# Altium PCB MainBoard.PcbDoc
Units mm, origin at the board's own origin, x right, y up, seen from the top; angles counter-clockwise.
Board outline 91.69 x 65.91 mm, 2 copper layers (Top Layer, Bottom Layer); 102 components, 75 nets, 350 pads, 131 vias.
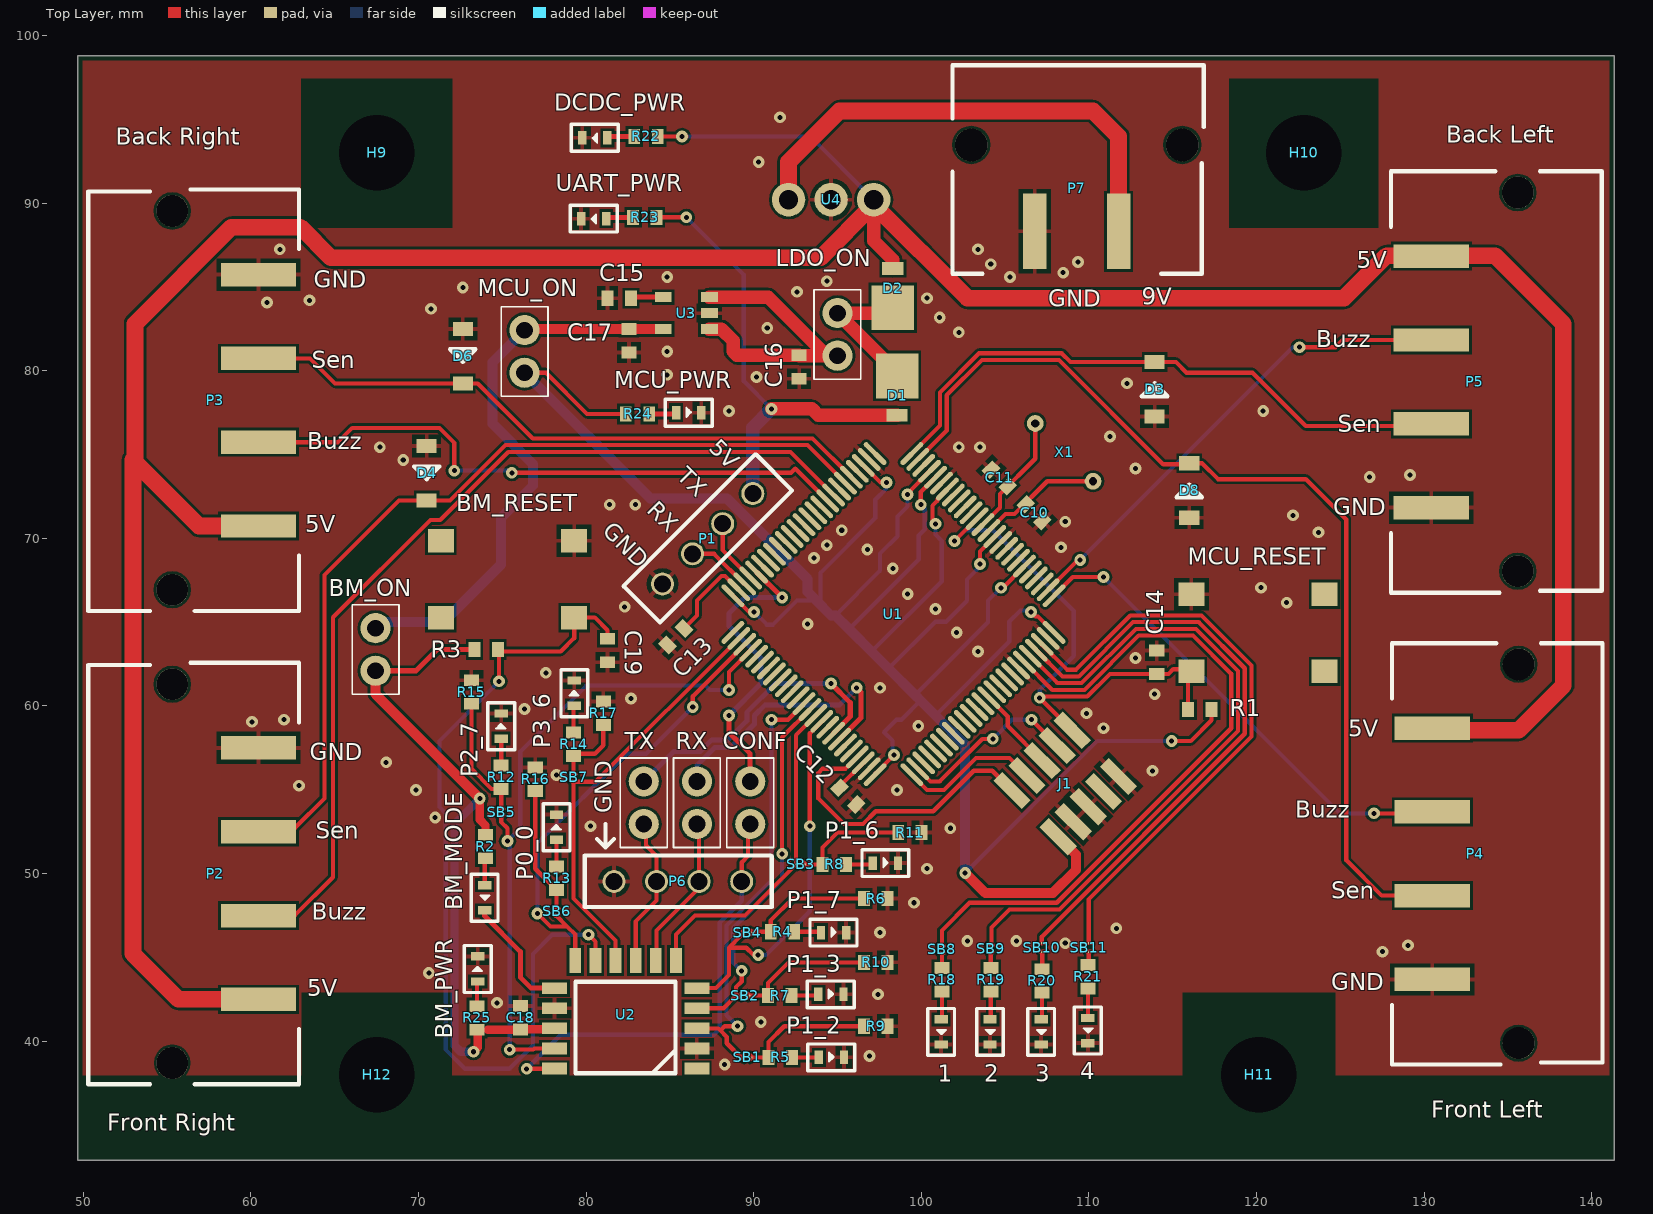
[diagram p0: Top Layer view]
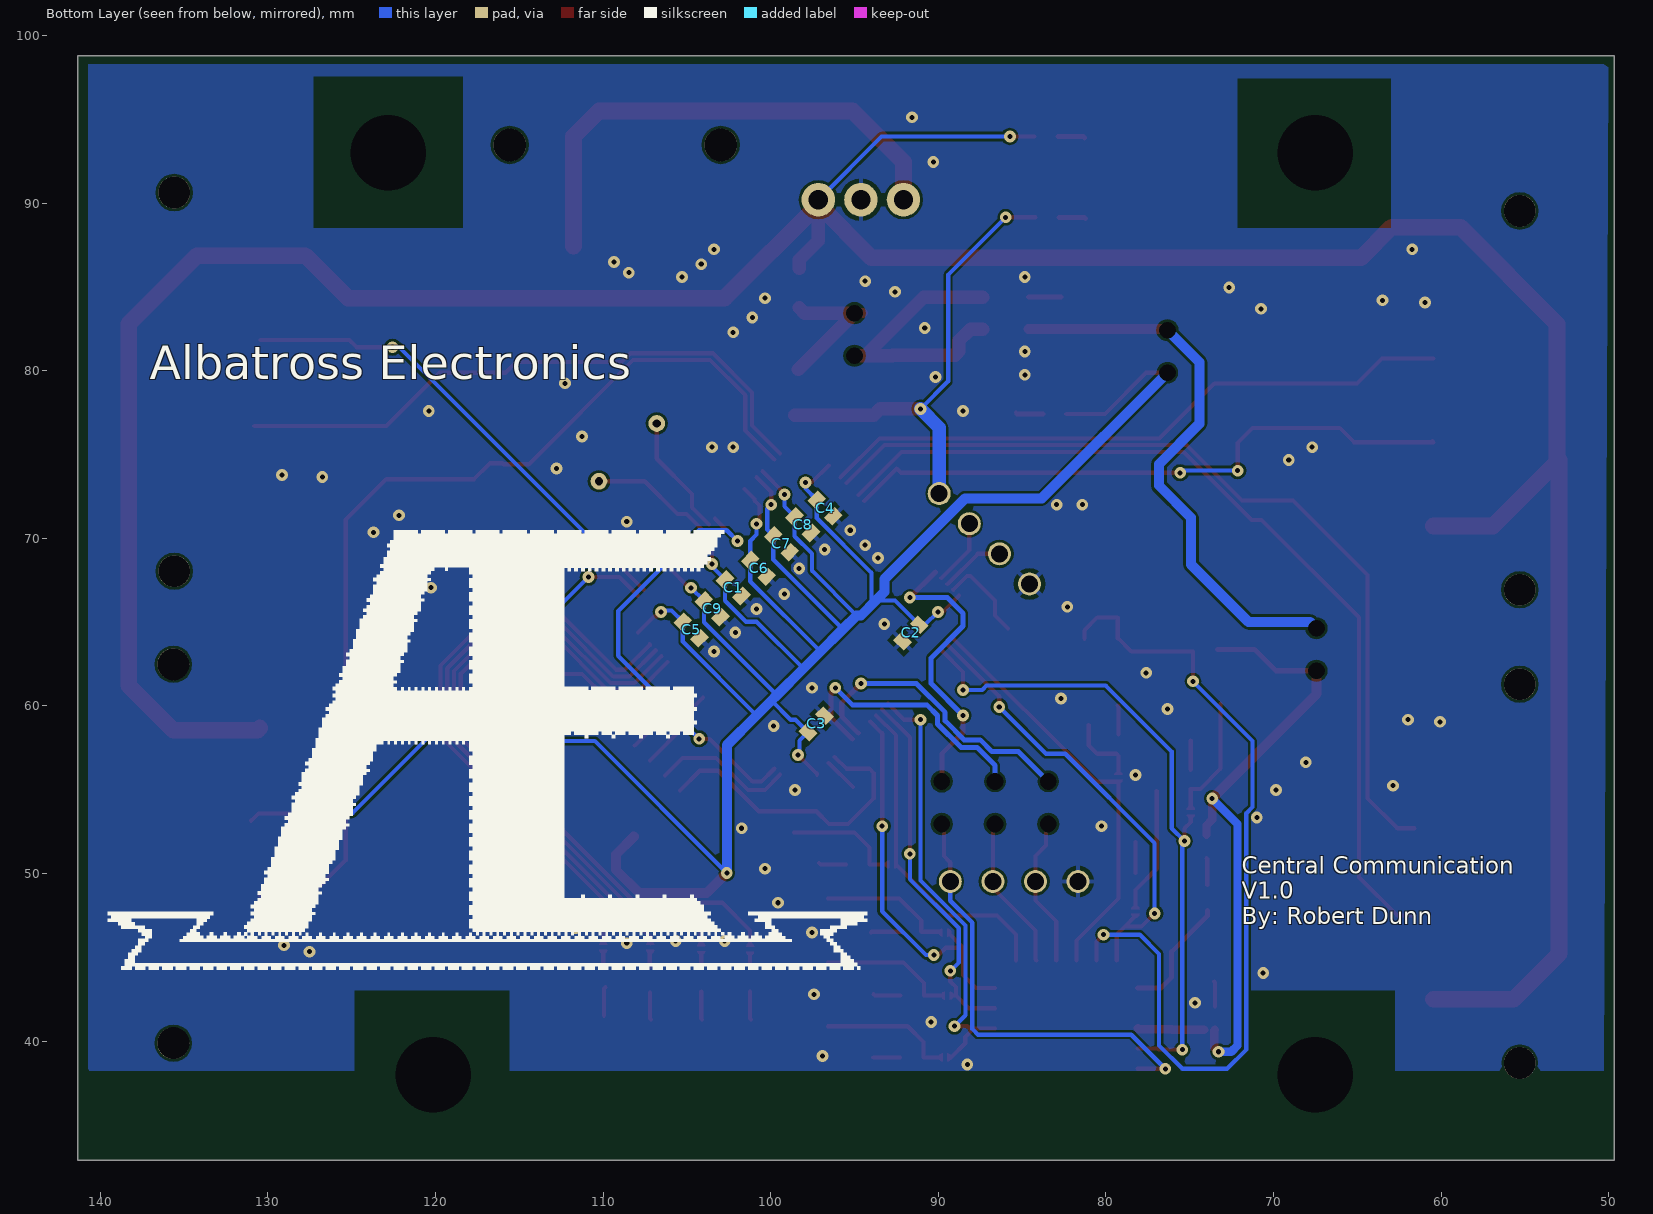
[diagram p1: Bottom Layer view, seen from below]
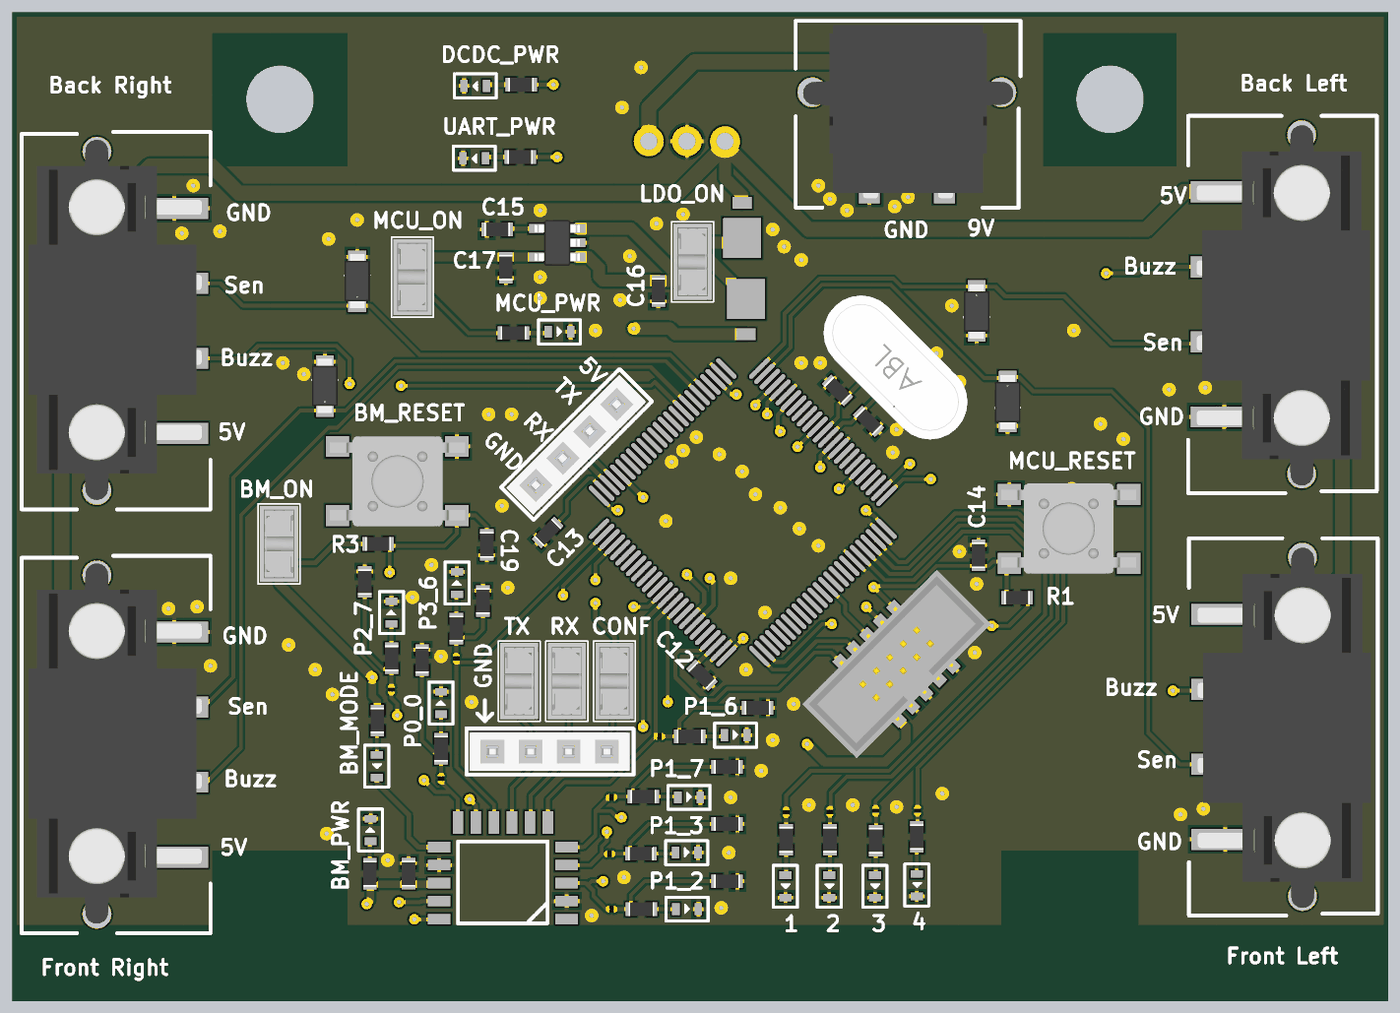
[diagram p2: 3D render of the assembled board from above, using the file's embedded part models]
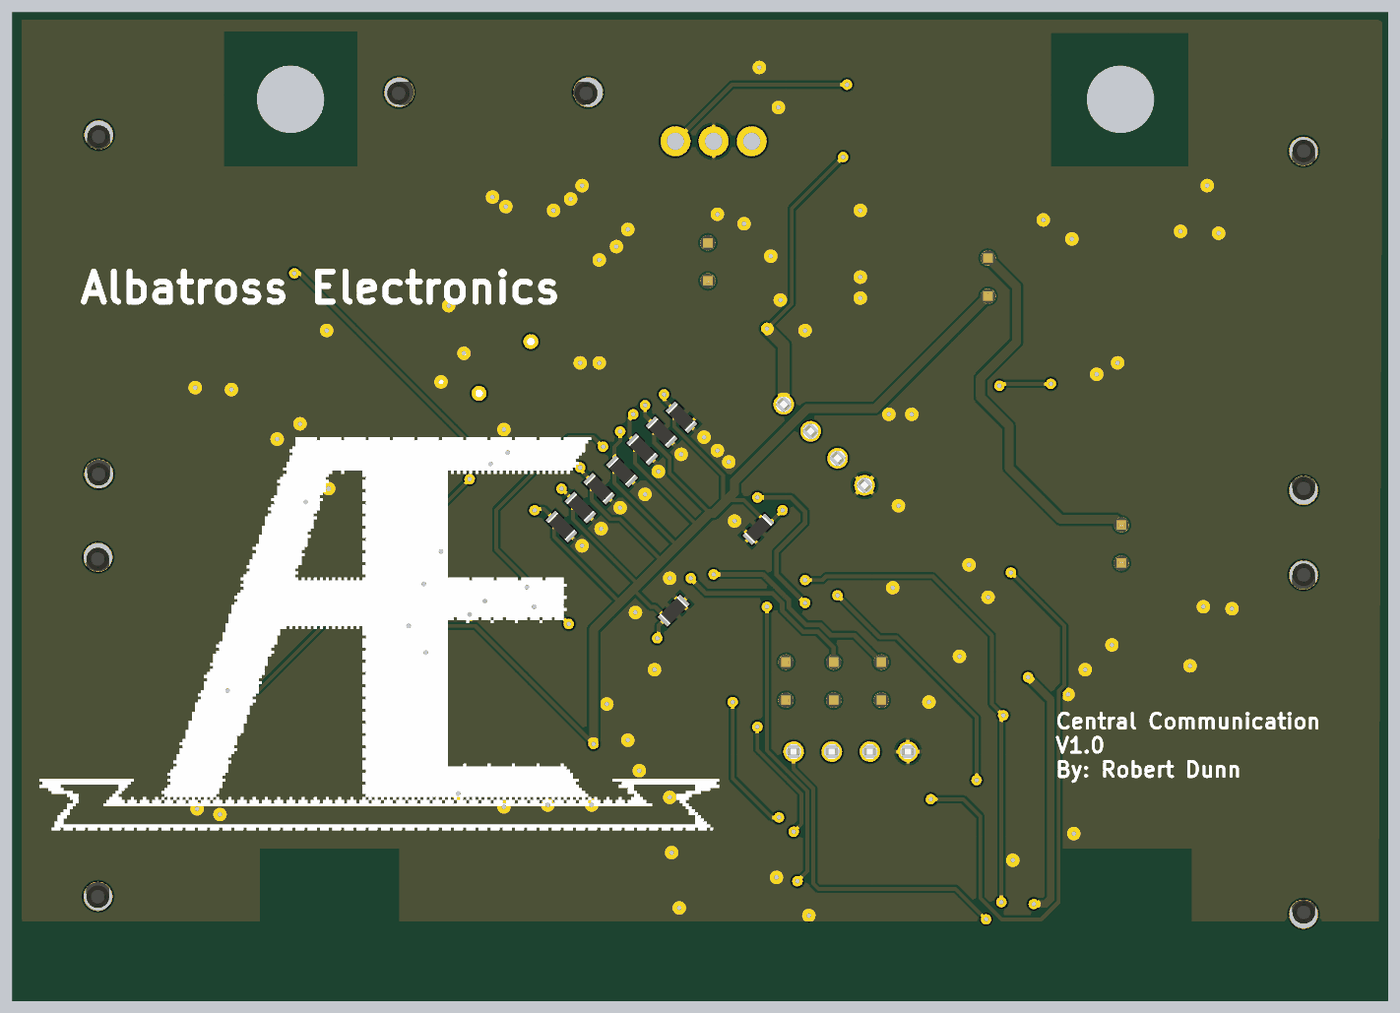
[diagram p3: 3D render of the assembled board from below, using the file's embedded part models]

## Layer stack, top to bottom
Top Solder: solder mask 0.0102, Solder Resist, Dk 3.5
Top Layer: signal copper 0.0356
Dielectric 1: dielectric 0.32, FR-4, Dk 4.8
Bottom Layer: signal copper 0.0356
Bottom Solder: solder mask 0.0102, Solder Resist, Dk 3.5

## Board outline
49.657,32.893 141.351,32.893 141.351,98.806 49.657,98.806

## Design rules (kind name [scope] priority, off if disabled: settings)
BoardOutlineClearance [All] p1: gap=0.3 ignorepadtopadclearanceinfootprint=FALSE
Clearance [All] p1: gap=0.152 ignorepadtopadclearanceinfootprint=FALSE except(0: Arc-Hole Track-Hole SMDPad-Hole THPad-Hole Via-Hole Fill-Hole Poly-Hole Region-Hole Text-Hole)
ComponentClearance [All] p1: gap=0.1 collisioncheckmode=3 verticalgap=0.254 showdistances=FALSE
FabricationTestPointUsage TestPointUsage [All] p1: valid=0 allowmultiple=FALSE
FabricationTestpoint Testpoint [All] p1: side=3 testpointundercomponent=TRUE minsize=1.016 maxsize=2.54 preferedsize=1.524 minholesize=0 maxholesize=1.016 preferedholesize=0.813 testpointgrid=0.025 allowsidetop=TRUE allowsidebottom=TRUE usegrid=TRUE gridtolerance=0
HoleSize [All] p1: absolutevalues=TRUE maxlimit=6.3 minlimit=0.3 maxpercent=80.000 minpercent=20.000
HoleToHoleClearance [All] p1: gap=0.45 allowstackedmicrovias=TRUE
MinimumAnnularRing [All] p1: minimumring=0.15
MinimumSolderMaskSliver [All] p1: minsoldermaskwidth=0.075
PlaneClearance [All] p1: clearance=0.5
PlaneConnect [All] p1: planeconnectstyle=Direct reliefexpansion=0.508 reliefentries=4 reliefconductorwidth=0.254 reliefairgap=0.254
PolygonConnect "GND Via" [isVia AND InNet('GND')] p1: connectstyle=Direct reliefconductorwidth=0.254 reliefentries=4 polygonreliefangle="90 Angle" airgapwidth=0.254 // GND Via Connection
PolygonConnect [All] p2: connectstyle=Relief reliefconductorwidth=0.254 reliefentries=4 polygonreliefangle="90 Angle" airgapwidth=0.25
RoutingVias [All] p1: holewidth=0.3 width=0.6 viastyle="Through Hole" minholewidth=0.3 minwidth=0.6 maxholewidth=6.3 maxwidth=6.6
SilkToSilkClearance [All] p1: silktosilkclearance=0.15
SilkToSolderMaskClearance SilkscreenOverComponentPads [IsPad] p1: minsilkscreentomaskgap=0.25 clearancetoexposedcopper=TRUE
SolderMaskExpansion [All] p1: expansion=0.1
Width [All] p1: maxlimit=2 minlimit=0.152 preferedwidth=0.25 minimp=50.000000 maximp=50.000000 favimp=50.000000
20 further rules are at their usual default settings.

## Components (designator, comment, footprint, x,y, rotation, side; value= is the part's Value field where it differs from the comment)
1 "LED" SMD_0603_LED 101.224,40.553 r270 top
2 "LED" SMD_0603_LED 104.145,40.553 r270 top
3 "LED" SMD_0603_LED 107.193,40.553 r270 top
4 "LED" SMD_0603_LED 109.982,40.64 r270 top
BM_MODE "LED" SMD_0603_LED 73.994,48.564 r270 top
BM_ON "2.54Jump" Jumper 67.437,62.103 r0 top
BM_PWR "LED" SMD_0603_LED 73.486,44.308 r90 top
BM_RESET "Tactile Switch" "C&K 4 pin Tactile Switch" 75.311,67.564 r0 top
C1 "SCH_GENERIC_CAPACITOR_0603" PCB_GENERIC_SMD_0603 102.235,67.056 r45 bottom
C2 "SCH_GENERIC_CAPACITOR_0603" PCB_GENERIC_SMD_0603 91.635,64.355 r135 bottom
C3 "SCH_GENERIC_CAPACITOR_0603" PCB_GENERIC_SMD_0603 97.282,58.928 r315 bottom
C4 "SCH_GENERIC_CAPACITOR_0603" PCB_GENERIC_SMD_0603 96.754,71.809 r45 bottom
C5 "SCH_GENERIC_CAPACITOR_0603" PCB_GENERIC_SMD_0603 104.746,64.535 r45 bottom
C6 "SCH_GENERIC_CAPACITOR_0603" PCB_GENERIC_SMD_0603 100.724,68.212 r45 bottom
C7 "SCH_GENERIC_CAPACITOR_0603" PCB_GENERIC_SMD_0603 99.353,69.673 r45 bottom
C8 "SCH_GENERIC_CAPACITOR_0603" PCB_GENERIC_SMD_0603 98.083,70.816 r45 bottom
C9 "SCH_GENERIC_CAPACITOR_0603" PCB_GENERIC_SMD_0603 103.489,65.792 r45 bottom
C10 "SCH_GENERIC_CAPACITOR_0603" PCB_GENERIC_SMD_0603 106.722,71.539 r135 top
C11 "SCH_GENERIC_CAPACITOR_0603" PCB_GENERIC_SMD_0603 104.656,73.605 r315 top
C12 "SCH_GENERIC_CAPACITOR_0603" PCB_GENERIC_SMD_0603 95.618,54.623 r135 top
C13 "SCH_GENERIC_CAPACITOR_0603" PCB_GENERIC_SMD_0603 85.344,64.135 r45 top
C14 "SCH_GENERIC_CAPACITOR_0603" PCB_GENERIC_SMD_0603 114.046,62.611 r90 top
C15 "SCH_GENERIC_CAPACITOR_0603" PCB_GENERIC_SMD_0603 81.977,84.328 r0 top
C16 "SCH_GENERIC_CAPACITOR_0603" PCB_GENERIC_SMD_0603 92.71,80.229 r270 top
C17 "SCH_GENERIC_CAPACITOR_0603" PCB_GENERIC_SMD_0603 82.55,81.788 r90 top
C18 "SCH_GENERIC_CAPACITOR_0603" PCB_GENERIC_SMD_0603 76.073,41.402 r270 top
C19 "C060-0001U-00" PCB_GENERIC_SMD_0603 81.28,63.311 r90 top value=1uF
CONF "2.54Jump" Jumper 89.789,55.499 r180 top
D1 "ONSEMI_MBRM110LT1G" "ON Semi Schottky Diode - MBRM110LT1G" 98.552,78.994 r270 top
D2 "ONSEMI_MBRM110LT1G" "ON Semi Schottky Diode - MBRM110LT1G" 98.298,84.455 r90 top
D3 "Zener3V3" Zener3V3 113.919,80.518 r180 top
D4 "Zener3V3" Zener3V3 70.485,72.263 r0 top
D6 "Zener3V3" Zener3V3 72.644,79.248 r0 top
D8 "Zener3V3" Zener3V3 115.983,74.486 r180 top
DCDC_PWR "LED" SMD_0603_LED 80.518,93.853 r180 top
H9 "M4_Hole" M4_Hole#1 52.197,79.121 r0 top
H10 "M4_Hole" M4_Hole#2 105.283,78.613 r0 top
H11 "M4_Hole" M4_Hole#3 102.616,25.019 r0 top
H12 "M4_Hole" M4_Hole#4 49.784,25.019 r0 top
J1 "JTDI Header" CONN-50mil-10POS-SMD 108.585,55.372 r135 top
LDO_ON "2.54Jump" Jumper 94.996,83.439 r180 top
MCU_ON "2.54Jump" Jumper 76.327,82.423 r180 top
MCU_PWR "LED" SMD_0603_LED 86.114,77.549 r0 top
MCU_RESET "Tactile Switch" "C&K 4 pin Tactile Switch" 120.083,64.368 r180 top
P0_0 "LED" SMD_0603_LED 78.185,52.767 r90 top
P1 "4-Pin Vertical Header" "4-Pin Vertical Header" 87.249,69.977 r135 top
P1_2 "LED" SMD_0603_LED 94.63,39.083 r0 top
P1_3 "LED" SMD_0603_LED 94.6,42.846 r0 top
P1_6 "LED" SMD_0603_LED 97.855,50.673 r0 top
P1_7 "LED" SMD_0603_LED 94.757,46.529 r0 top
P2 "4 Screw Term" "4 Pin Screw Terminal" 60.452,57.498 r270 top
P2_7 "LED" SMD_0603_LED 74.883,58.799 r90 top
P3 "4 Screw Term" "4 Pin Screw Terminal" 60.452,85.739 r270 top
P3_6 "LED" SMD_0603_LED 79.248,60.768 r90 top
P4 "4 Screw Term" "4 Pin Screw Terminal" 130.486,43.684 r90 top
P5 "4 Screw Term" "4 Pin Screw Terminal" 130.429,71.835 r90 top
P6 "4-Pin Vertical Header" "4-Pin Vertical Header" 85.471,49.53 r90 top
P7 "2 Screw Term" PCBComponent_1 111.77,88.322 r180 top
R1 "SCH_GENERIC_RESISTOR_0603" PCB_GENERIC_SMD_0603 116.616,59.782 r0 top
R2 "SCH_GENERIC_RESISTOR_0603" PCB_GENERIC_SMD_0603 73.994,51.612 r90 top
R3 "SCH_GENERIC_RESISTOR_0603" PCB_GENERIC_SMD_0603 74.041,63.373 r0 top
R4 "SCH_GENERIC_RESISTOR_0603" PCB_GENERIC_SMD_0603 91.709,46.529 r0 top
R5 "SCH_GENERIC_RESISTOR_0603" PCB_GENERIC_SMD_0603 91.582,39.036 r0 top
R6 "SCH_GENERIC_RESISTOR_0603" PCB_GENERIC_SMD_0603 97.282,48.514 r180 top
R7 "SCH_GENERIC_RESISTOR_0603" PCB_GENERIC_SMD_0603 91.552,42.719 r0 top
R8 "SCH_GENERIC_RESISTOR_0603" PCB_GENERIC_SMD_0603 94.807,50.546 r0 top
R9 "SCH_GENERIC_RESISTOR_0603" PCB_GENERIC_SMD_0603 97.282,40.894 r180 top
R10 "SCH_GENERIC_RESISTOR_0603" PCB_GENERIC_SMD_0603 97.282,44.704 r180 top
R11 "SCH_GENERIC_RESISTOR_0603" PCB_GENERIC_SMD_0603 99.314,52.451 r180 top
R12 "SCH_GENERIC_RESISTOR_0603" PCB_GENERIC_SMD_0603 74.93,55.751 r90 top
R13 "SCH_GENERIC_RESISTOR_0603" PCB_GENERIC_SMD_0603 78.232,49.719 r90 top
R14 "SCH_GENERIC_RESISTOR_0603" PCB_GENERIC_SMD_0603 79.248,57.72 r90 top
R15 "SCH_GENERIC_RESISTOR_0603" PCB_GENERIC_SMD_0603 73.152,60.833 r270 top
R16 "SCH_GENERIC_RESISTOR_0603" PCB_GENERIC_SMD_0603 76.962,55.626 r270 top
R17 "SCH_GENERIC_RESISTOR_0603" PCB_GENERIC_SMD_0603 81.026,59.563 r270 top
R18 "SCH_GENERIC_RESISTOR_0603" PCB_GENERIC_SMD_0603 101.224,43.663 r90 top
R19 "SCH_GENERIC_RESISTOR_0603" PCB_GENERIC_SMD_0603 104.145,43.663 r90 top
R20 "SCH_GENERIC_RESISTOR_0603" PCB_GENERIC_SMD_0603 107.193,43.601 r90 top
R21 "SCH_GENERIC_RESISTOR_0603" PCB_GENERIC_SMD_0603 109.94,43.84 r90 top
R22 "SCH_GENERIC_RESISTOR_0603" PCB_GENERIC_SMD_0603 83.566,93.98 r180 top
R23 "SCH_GENERIC_RESISTOR_0603" PCB_GENERIC_SMD_0603 83.501,89.154 r180 top
R24 "SCH_GENERIC_RESISTOR_0603" PCB_GENERIC_SMD_0603 83.066,77.422 r0 top
R25 "SCH_GENERIC_RESISTOR_0603" PCB_GENERIC_SMD_0603 73.486,41.387 r90 top
RX "2.54Jump" Jumper 86.614,55.499 r180 top
SB1 "N/O" SB_NO 89.656,39.036 r180 top
SB2 "N/O" SB_NO 89.52,42.719 r180 top
SB3 "N/O" SB_NO 92.837,50.546 r180 top
SB4 "N/O" SB_NO 89.662,46.482 r180 top
SB5 "N/O" SB_NO 74.93,53.721 r270 top
SB6 "N/O" SB_NO 78.232,47.793 r270 top
SB7 "N/O" SB_NO 79.248,55.794 r270 top
SB8 "N/O" SB_NO 101.224,45.428 r90 top
SB9 "N/O" SB_NO 104.14,45.466 r90 top
SB10 "N/O" SB_NO 107.188,45.538 r90 top
SB11 "N/O" SB_NO 109.982,45.538 r90 top
TX "2.54Jump" Jumper 83.439,55.499 r180 top
U1 "STM32F407VGT6" STM-LQFP100_N 98.337,65.482 r225 top
U2 "BM71BLES1FC2" BM71BLES1FC2 86.855,45.067 r180 top
U3 "3.3V LDO" SOT95P280X145-5N 85.979,83.439 r180 top
U4 "R78E-1.0 DC/DC" R78-1.0 94.615,92.456 r0 top
UART_PWR "LED" SMD_0603_LED 80.453,89.027 r180 top
X1 "XTAL" CRYSTAL_8MHZ 108.518,75.132 r135 top

## Footprints (in the part's own frame and the unit in brackets; to place one, negate y for a bottom-side part, rotate by r counter-clockwise, add the part's x,y. Pads: shape width x height; smd on the part's side, far side on the other; paste and mask are expansions set on the pad)
"4 Pin Screw Terminal" [mm]
  rect 1.4x4.5 smd: 1(0,0) 2(5,0) 3(10,0) 4(15,0)
  round 1.9 hole 1.9: ""(-3.8,-5.15) ""(18.8,-5.15)
  silkscreen extent -5.08,-10.16 20.07,2.41, body extent -4.57,-9.71 19.43,1.84, height 10.95
"4-Pin Vertical Header" [mil]
  round 54 hole 40: 1(0,150) 2(0,50) 3(0,-50) 4(0,-150)
  silkscreen extent -60,-220 61,219, body extent -50,-210 50,210, height 335
BM71BLES1FC2 [mm] "Bluetooth Module"
  rect 1.5x0.7 smd: 1(0.25,6.7) 2(0.25,5.5) 3(0.25,4.3) 4(0.25,3.1) 5(0.25,1.9) 12(8.75,1.9) 13(8.75,3.1) 14(8.75,4.3) 15(8.75,5.5) 16(8.75,6.7)
  rect 0.7x1.5 smd: 6(1.5,0.25) 7(2.7,0.25) 8(3.9,0.25) 9(5.1,0.25) 10(6.3,0.25) 11(7.5,0.25)
  silkscreen extent 1.52,1.52 7.49,6.99, body extent 0,7.49 9.02,11.56, height 2
"C&K 4 pin Tactile Switch" [mm] "4 Pin Tactile Switch, SMT"
  rect 1.55x1.4 smd mask+0.1: 1(-3.975,2.3)
  rect 1.55x1.4 smd: 2(3.975,2.3) 3(-3.975,-2.3) 4(3.975,-2.3)
  body extent -4.47,-3.02 4.53,2.98, height 5
CONN-50mil-10POS-SMD [mm] "50mil 10POS 2ROW SMT HEADER"
  rect 2.4x0.76 smd: 1(-1.95,2.54) 2(1.95,2.54) 3(-1.95,1.27) 4(1.95,1.27) 5(-1.95,0) 6(1.95,0) 7(-1.95,-1.27) 8(1.95,-1.27) 9(-1.95,-2.54) 10(1.95,-2.54)
  body extent -2.75,-6.33 2.75,6.32, height 5.57
CRYSTAL_8MHZ [mm] "631-1100-ND"
  round 1 hole 0.5: 1(-2.44,0) 2(2.44,0)
  body extent -5.75,-2.5 5.75,2.5, height 3.55
Jumper [mm]
  round 1.8 / inner round 0 / far side round 0 hole 1: 1(0,0) 2(0,2.54)
  silkscreen extent -1.4,-1.4 1.4,3.94, body extent -1.91,-1.27 1.27,3.94, height 11.35
M4_Hole#1 [mm]
  round 0 hole 4.5 unplated mask+2: 1(15.303,13.879)
M4_Hole#2 [mm]
  round 0 hole 4.5 unplated mask+2: 1(17.526,14.387)
M4_Hole#3 [mm]
  round 0 hole 4.5 unplated mask+2: 1(17.526,12.981)
M4_Hole#4 [mm]
  round 0 hole 4.5 unplated mask+2: 1(17.716,12.981)
"ON Semi Schottky Diode - MBRM110LT1G" [mm]
  rect 2.67x2.54 smd: 1(-0.7,0)
  rect 0.762x1.27 smd: 2(1.649,0)
  body extent -1.97,-1.65 0.95,1.65, height 1.02
PCB_GENERIC_SMD_0603 [mm]
  rect 0.7x0.9 smd: 1(-0.7,0) 2(0.7,0)
  body extent -0.85,-0.45 0.85,0.45, height 0.55
PCBComponent_1 [mm]
  rect 1.4x4.5 smd: 1(0,0) 2(5,0)
  round 1.95 hole 1.95 mask+0.102: 11(8.8,-5.15)
  round 1.95 hole 1.95: ""(-3.8,-5.15)
  silkscreen extent -5.08,-9.91 9.91,2.54, body extent -4.59,-9.63 9.41,1.92, height 10.95
R78-1.0 [mm]
  round 2 hole 1.15: 1(-2.54,-2.25) 2(0,-2.25) 3(2.54,-2.25)
  body extent -5.8,-4.25 5.8,4.25, height 10.4
SB_NO [mil] "Solder Bridge, Normally Open"
  round 5 smd paste-20 mask-1: 1(-8.5,0) 2(12.17,0)
  Top Layer region: -13,0 -12.28,3.64 -10.22,6.72 -7.14,8.78 -3.5,9.5 -3.5,9.5 -3.5,-9.5 -7.14,-8.78 -10.22,-6.72 -12.28,-3.64 -13,0
  Top Layer region: 17.5,0 16.78,-3.64 14.72,-6.72 11.64,-8.78 8,-9.5 8,-9.5 8,9.5 11.64,8.78 14.72,6.72 16.78,3.64 17.5,0
SMD_0603_LED [mm]
  rect 0.5x0.8 smd: 1(-0.747,-0.047) 2(0.753,-0.047)
  silkscreen extent -1.4,-0.85 1.4,0.75, body extent -0.75,-0.55 0.75,0.45, height 0.45
SOT95P280X145-5N [mm] "SOT23, 5-Leads, Body 2.90x2.80mm, Pitch 0.95mm, IPC Medium Density"
  rect 1x0.6 smd: 1(-1.375,0.95) 2(-1.375,0) 3(-1.375,-0.95) 4(1.375,-0.95) 5(1.375,0.95)
  body extent -1.5,-1.53 1.5,1.53, height 1.45
STM-LQFP100_N [mm] "Thin QFP, 100-Leads, Body 14x14mm, Pitch 0.5mm, IPC Medium Density"
  oval 1.8x0.3 smd: 1(-7.55,6) 2(-7.55,5.5) 3(-7.55,5) 4(-7.55,4.5) 5(-7.55,4) 6(-7.55,3.5) 7(-7.55,3) 8(-7.55,2.5) 9(-7.55,2) 10(-7.55,1.5) 11(-7.55,1) 12(-7.55,0.5) 13(-7.55,0) 14(-7.55,-0.5) 15(-7.55,-1) 16(-7.55,-1.5) 17(-7.55,-2) 18(-7.55,-2.5) 19(-7.55,-3) 20(-7.55,-3.5) 21(-7.55,-4) 22(-7.55,-4.5) 23(-7.55,-5) 24(-7.55,-5.5) 25(-7.55,-6) 51(7.55,-6) 52(7.55,-5.5) 53(7.55,-5) 54(7.55,-4.5) 55(7.55,-4) 56(7.55,-3.5) 57(7.55,-3) 58(7.55,-2.5) 59(7.55,-2) 60(7.55,-1.5) 61(7.55,-1) 62(7.55,-0.5) 63(7.55,0) 64(7.55,0.5) 65(7.55,1) 66(7.55,1.5) 67(7.55,2) 68(7.55,2.5) 69(7.55,3) 70(7.55,3.5) 71(7.55,4) 72(7.55,4.5) 73(7.55,5) 74(7.55,5.5) 75(7.55,6)
  oval 0.3x1.8 smd: 26(-6,-7.55) 27(-5.5,-7.55) 28(-5,-7.55) 29(-4.5,-7.55) 30(-4,-7.55) 31(-3.5,-7.55) 32(-3,-7.55) 33(-2.5,-7.55) 34(-2,-7.55) 35(-1.5,-7.55) 36(-1,-7.55) 37(-0.5,-7.55) 38(0,-7.55) 39(0.5,-7.55) 40(1,-7.55) 41(1.5,-7.55) 42(2,-7.55) 43(2.5,-7.55) 44(3,-7.55) 45(3.5,-7.55) 46(4,-7.55) 47(4.5,-7.55) 48(5,-7.55) 49(5.5,-7.55) 50(6,-7.55) 76(6,7.55) 77(5.5,7.55) 78(5,7.55) 79(4.5,7.55) 80(4,7.55) 81(3.5,7.55) 82(3,7.55) 83(2.5,7.55) 84(2,7.55) 85(1.5,7.55) 86(1,7.55) 87(0.5,7.55) 88(0,7.55) 89(-0.5,7.55) 90(-1,7.55) 91(-1.5,7.55) 92(-2,7.55) 93(-2.5,7.55) 94(-3,7.55) 95(-3.5,7.55) 96(-4,7.55) 97(-4.5,7.55) 98(-5,7.55) 99(-5.5,7.55) 100(-6,7.55)
  body extent -7,-7 7,7, height 1.6
Zener3V3 [mm]
  rect 1.2x0.85 smd: 1(0,0) 2(0,3.25)
  silkscreen extent -0.76,1.27 0.76,2.03, body extent -0.85,-0.15 0.85,3.45, height 0.84

## Part data
1 2 3 4 BM_MODE BM_PWR DCDC_PWR MCU_PWR P0_0 P1_2 P1_3 P1_6 P1_7 P2_7 P3_6 UART_PWR: library part SMD_0603_LED
BM_ON CONF LDO_ON MCU_ON RX TX: library part Jumper, "WM23943-ND"
BM_RESET MCU_RESET: library part "C&K Tactile Switch", Supplier Part Number 1=CKN9085CT-ND, Supplier 1=Digi-Key
C1 C2 C3 C4 C5 C6 C7 C8 C14: "Generic SMD capacitor 0603", Capacitance=0.1uF, Tolerance=*%
C9: "Generic SMD capacitor 0603", Capacitance=0.1uF
C10 C11: "Generic SMD capacitor 0603", Capacitance=30pF, Tolerance=*%
C12 C13: "Generic SMD capacitor 0603", Capacitance=2.2uF, Tolerance=*%
C15: "Generic SMD capacitor 0603", Capacitance=10nF, Tolerance=*%
C16: "Generic SMD capacitor 0603", Capacitance=1uF, Tolerance=*%
C17: "Generic SMD capacitor 0603", Capacitance=10uF
C18: "Generic SMD capacitor 0603", Capacitance=10uF, Tolerance=*%
C19: "CAP CER 0603 1uF 16V X5R 20%", Package=0603, Tolerance=20%, Voltage=16V
D1 D2: "DIODE SCHOTTKY 10V 1A", Supplier Part Number 1=MBRM110LT1GOSDKR-ND, Supplier 1=Digi-Key
D3 D4 D6 D8: library part DZ2W03300LCT-ND, "DZ2W03300LCT-ND"
J1: library part "conn_0.050\"_cortexM", "ARM Cortex-M 10pin connector,shrouded,SMT", Supplier Part Number 1=1175-1629-ND, Supplier 1=Digi-Key
P1 P6: Manufacturer=Sullins, Manufacturer No.=PPPC041LFBN-RC
P2 P3 P4 P5: library part 1297-1110-1-ND, "1297-1110-1-ND"
P7: Supplier Part Number=1297-1108-1-ND, Supplier=Digikey
R1 R6 R9 R10 R11 R15 R16 R17: "Generic SMD resistor 0603", Resistance=10K
R2 R4 R5 R7 R8 R12 R13 R14 R18 R19 R20 R21 R22 R23 R24 R25: "Generic SMD resistor 0603", Resistance=330R
R3: "Generic SMD resistor 0603", Resistance=4k7
SB1 SB2 SB3 SB4 SB5 SB6 SB7 SB8 SB9 SB10 SB11: library part SB_NO, "Solder Bridge, Normally Open"
U1: "ARM Cortex-M4 32-bit MCU+FPU, 210 DMIPS, 1024 kB Flash, 192 kB Internal RAM, 82 I/Os, 100-pin LQFP, -40 to 85 degC, Tray", I/Os (High Current)=82, Manufacturer=STMicroelectronics, Operating Frequency(F) (Processor speed) (MHz)=168, Supplier Part Number 1=497-11605-ND, Supply Voltage(Vcc) max (V)=3.6, Supply Voltage(Vcc) min (V)=1.8, ComponentLink1Description="Manufacturer URL", ComponentLink1URL=http://www.st.com/web/en/home.html, ComponentLink2Description=Datasheet, ComponentLink2URL=http://www.st.com/st-web-ui/static/active/en/resource/technical/document/datasheet/DM00037051.pdf, ComponentLink3Description="Package Specification", ComponentLink3URL=http://www.st.com/st-web-ui/static/active/en/resource/technical/document/data_brief/DM00071938.pdf, Core="ARM Cortex-M4", D/A Converter=2x12-bit, DatasheetVersion="Rev. 4", FLASH Size (Prog) (kB)=1024, Internal RAM Size (kB)=192, Mounting Technology="Surface Mount", PackageDescription="100-Pin Low Profile Quad Flat Package, 14 x 14 mm Body, 0.5 mm Pitch", PackageReference=LQFP100, PackageVersion="Rev. 1, 06/2013", Packing=Tray, PartNumber=STM32F407VGT6, Supplier 1=Digi-Key, Supplier 2=Farnell, Supplier 3=Newark, Supplier 4=Mouser, Supplier Part Number 2=2064368, Supplier Part Number 3=73T2333, Supplier Part Number 4=511-STM32F407VGT6
U2: library part "BM71 Bluetooth Module", "BM71 Bluetooth Module"
U3: library part 3V3LDO_TPS73633DBVR_SOT23-5, "Linear Voltage Regulator IC Positive Fixed 1 Output 3.3V 400mA SOT-23-5"
U4: library part R78E-1.0
X1: library part Crystal, Frequency=8MHz

## Via types
v1: diameter 0.7, hole 0.3, Top Layer to Bottom Layer, 131 vias

## Nets (pads, with @x,y where several pads share a name; then routed paths per layer and width w, separated by ;. In a path a pad name is that pad's centre, name@x,y a point inside that pad or via, vN(x,y) a via of type N, cw(c..) or ccw(c..) an arc to the next point about the centre after c; other vN are vias at no path point)
3V3: BM_ON.2 C17.2 MCU_ON.1 U3.5 | length 33.9
  Top Layer w0.6: MCU_ON.1 76.392,82.488 C17.2 ; C17.2 U3.5
  Bottom Layer w0.6: BM_ON.2 67.818,65.024 71.501,65.024 74.93,68.453 74.93,71.247 76.835,73.152 76.835,74.422 74.422,76.835 74.422,80.518 MCU_ON.1
3V3_BM: BM_ON.1 C18.2 R2.2 R3.1 R25.1 U2.14 | length 41.1
  Top Layer w0.3: BM_ON.1 69.85,62.103 71.12,63.373 R3.1
  Top Layer w0.5: v1(73.279,39.37) 73.533,39.624 73.533,40.64 R25.1 ; v1(73.66,54.483) 73.66,53.213 73.994,52.879 R2.2 ; 74.121,40.687 76.058,40.687 C18.2 78.04,40.702 U2.14
  Top Layer w0.6: BM_ON.1 67.437,60.706 v1(73.66,54.483)
  Bottom Layer w0.5: v1(73.279,39.37) 72.517,39.37 72.148,39.739 72.148,52.971 v1(73.66,54.483)
3V3_MCU: C1.2 C2.2 C3.2 C4.2 C5.2 C6.2 C7.2 C8.2 C9.2 J1.1 MCU_ON.2 R1.2 R24.1 U1.6 U1.11 U1.19 U1.21 U1.22 U1.28 U1.50 U1.75 U1.100 | length 169.6
  Top Layer w0.25: MCU_ON.2 77.597,79.883 80.058,77.422 R24.1 ; U1.50 89.721,65.613 v1(90.019,65.613) ; U1.28 97.554,73.336 v1(97.921,73.336) ; U1.75 97.241,55.952 v1(98.37,57.081) ; v1(99.178,72.617) 99.178,72.687 U1.22 ; v1@100.07,72.009 v1(99.966,72.009) 99.966,72.768 U1.21 ; v1(100.838,70.866) 100.667,71.037 100.667,71.952 100.965,72.25 100.965,72.353 U1.19 ; v1(103.505,68.47) 103.505,69.221 104.383,70.098 U1.11 ; v1@104.8,66.995 U1.6 ; v1(106.542,65.613) 106.812,65.343 106.961,65.343 U1.100 ; v1(114.935,57.912) 116.078,57.912 117.316,59.15 R1.2
  Top Layer w0.6: v1(102.616,50.038) 103.817,48.837 107.838,48.837 109.22,50.22 109.22,51.145 J1.1
  Bottom Layer w0.25: v1(90.019,65.613) 90.781,64.85 C2.2 92.584,66.294 93.726,66.294 93.98,66.294 93.98,67.945 97.249,71.214 C4.2 97.921,72.976 v1(97.921,73.336) ; 94.869,65.405 97.536,68.072 97.536,69.088 98.578,70.13 C8.2 99.178,71.911 v1(99.178,72.617) ; 95.694,64.579 99.848,68.733 C7.2 100.203,70.523 100.203,71.772 v1(99.966,72.009) ; 97.028,63.246 101.219,67.437 C6.2 101.219,69.85 100.838,70.231 v1(100.838,70.866) ; 98.044,62.23 100.838,65.024 101.473,65.024 102.73,66.281 C1.2 103.505,68.326 v1(103.505,68.47) ; v1(98.37,57.081) 98.28,57.171 98.28,57.93 C3.2 98.526,59.182 98.806,59.182 99.949,60.325 ; 99.632,60.642 103.984,64.995 C9.2 v1(104.746,67.049) ; 100.838,59.436 105.241,63.839 C5.2 105.914,65.702 106.452,65.702 v1(106.542,65.613) ; v1(102.616,50.038) 110.49,57.912 v1(114.935,57.912)
  Bottom Layer w0.6: MCU_ON.2 83.82,72.39 88.392,72.39 93.218,67.564 93.218,66.802 93.726,66.294 94.615,65.405 94.869,65.405 95.694,64.579 ; 95.758,64.516 97.028,63.246 98.044,62.23 99.632,60.642 99.949,60.325 100.838,59.436 102.616,57.658 v1(102.616,50.038)
5V: D1.1 D2.1 LDO_ON.1 | length 8.7
  Top Layer w0.6: LDO_ON.1@94.488,83.439 LDO_ON.1
  Top Layer w0.8: D2.1 97.982,83.439 LDO_ON.1 D1.1@98.36,80.075
5V_DCDC: D2.2 P2.4 P3.4 P4.4 P5.4 R22.1 U4.3 | length 200
  Top Layer w0.25: R22.1 v1@85.979,93.98
  Top Layer w0.8: U4.3 97.155,89.916 97.155,87.757 98.298,86.614 D2.2
  Top Layer w1: P2.4 55.673,42.498 52.959,45.212 52.959,74.676 53.086,74.549 ; P3.4 56.896,70.739 53.086,74.549 ; P4.4 130.623,58.547 135.636,58.547 138.303,61.214 138.303,82.804 134.239,86.868 127.762,86.868 125.222,84.328 102.743,84.328 97.155,89.916 93.98,86.741 64.77,86.741 62.945,88.566 58.848,88.566 53.086,82.804 53.086,74.549
  Bottom Layer w0.25: v1(85.725,93.98) 93.381,93.98 U4.3
5V_UART: D1.2 P1.4 R23.1 | length 28.6
  Top Layer w0.25: R23.1 v1(85.979,89.154)
  Top Layer w0.8: v1(91.059,77.724) 93.472,77.724 93.851,77.345 D1.2
  Bottom Layer w0.25: v1(85.979,89.154) 89.408,85.725 89.408,79.375 v1(91.059,77.724)
  Bottom Layer w0.8: P1.4@89.943,72.544 P1.4 89.943,76.608 v1(91.059,77.724)
9V: P7.1 U4.1 | length 30.4
  Top Layer w1: U4.1 92.075,92.456 95.123,95.504 110.236,95.504 111.76,93.98 P7.1@111.76,87.433
BackLeftBuzz: P5.3 U1.2 | length 29
  Top Layer w0.25: U1.2 109.34,68.707 v1(109.474,68.707) ; v1(122.555,81.407) 124.714,81.407 125.142,81.835 P5.3
  Bottom Layer w0.25: v1(109.474,68.707) 122.174,81.407 v1(122.555,81.407)
BackLeftSense: D3.1 P5.2 U1.25 | length 36.8
  Top Layer w0.25: U1.25 101.111,76.741 101.111,78.711 103.448,81.047 108.371,81.047 108.9,80.518 D3.1 115.189,80.518 115.824,79.883 119.761,79.883 122.936,76.708 P5.2@130.81,76.708
BackRightBuzz: P3.3 U1.34 | length 37.4
  Top Layer w0.25: P3.3@60.532,75.819 P3.3 65.198,75.739 66.04,76.581 71.247,76.581 72.136,75.692 v1(72.136,74.041) ; v1(75.565,73.914) 92.225,73.914 92.479,74.168 U1.34
  Bottom Layer w0.25: v1(72.136,74.041) 75.438,74.041 v1(75.565,73.914)
BackRightSense: D6.1 P3.2 U1.30 | length 38.3
  Top Layer w0.25: P3.2 63.533,80.739 65.024,79.248 D6.1 73.533,79.248 76.814,75.967 93.508,75.967 U1.30
BM71_RX: P6.3 RX.2 U2.7 | length 9.2
  Top Layer w0.25: U2.7 84.201,44.863 84.201,46.609 86.741,49.149 P6.3 RX.2@86.741,52.959
BM71_TX: P6.2 TX.2 U2.8 | length 8.9
  Top Layer w0.25: U2.8 82.955,47.141 84.201,48.387 P6.2 84.201,51.054 83.566,51.689 TX.2@83.566,52.959
CONFIG: CONF.2 P6.4 U2.16 | length 27.2
  Top Layer w0.25: v1(76.454,38.354) 78.092,38.354 U2.16 ; P6.4 89.281,50.673 89.662,51.054 89.662,52.705 CONF.2@89.916,52.959
  Bottom Layer w0.25: v1(76.454,38.354) 78.486,40.386 87.63,40.386 87.968,40.724 87.968,47.069 89.281,48.382 P6.4
CONFIG_MCU: CONF.1 U1.46 | length 17.9
  Top Layer w0.3: v1(88.519,59.436) 88.519,58.42 89.789,57.15 CONF.1 ; U1.46 v1(91.694,66.468)
  Bottom Layer w0.3: v1(88.519,59.436) 90.424,61.341 90.424,62.865 88.519,64.77 88.519,65.532 89.455,66.468 v1(91.694,66.468)
Debug_RX: P1.2 U1.48 | length 3.9
  Top Layer w0.25: P1.2 87.639,69.079 89.433,67.285 U1.48
Debug_TX: P1.3 U1.47 | length 3.9
  Top Layer w0.25: P1.3 88.147,69.308 U1.47
FrontLeftBuzz: P4.3 U1.1 | length 29.6
  Top Layer w0.25: U1.1 109.031,67.691 v1(110.871,67.691) ; v1(127,53.594) 130.556,53.594 P4.3@131,53.149
  Bottom Layer w0.25: v1(110.871,67.691) 124.968,53.594 v1(127,53.594)
FrontLeftSense: D8.1 P4.2 U1.24 | length 59.6
  Top Layer w0.25: U1.24 101.513,76.436 101.513,78.544 103.614,80.645 108.204,80.645 114.427,74.422 115.919,74.422 D8.1 116.745,74.486 117.697,73.533 122.936,73.533 125.349,71.12 125.349,50.8 127.465,48.684 P4.2
FrontRightBuzz: P2.3 U1.33 | length 54.8
  Top Layer w0.25: P2.3@61.595,47.498 62.611,47.498 64.897,49.784 64.897,65.292 70.709,71.105 71.293,71.105 75.351,75.163 92.191,75.163 U1.33
FrontRightSense: D4.1 P2.2 U1.31 | length 52.1
  Top Layer w0.25: P2.2@61.595,52.705 62.611,52.705 64.389,54.483 64.389,67.818 68.834,72.263 D4.1 71.882,72.263 75.184,75.565 93.203,75.565 U1.31
GND: 1.2 2.2 3.2 4.2 BM_PWR.2 BM_RESET.2 C1.1 C2.1 C3.1 C4.1 C5.1 C6.1 C7.1 C8.1 C9.1 C10.1 C11.1 C12.1 C13.1 C14.2 C15.1 C16.2 C17.1 C18.1 C19.1 D3.2 D4.2 D6.2 D8.2 DCDC_PWR.2 J1.3 J1.5 J1.9 MCU_PWR.2 MCU_RESET.4 P0_0.2 P1.1 P1_2.2 P1_3.2 P1_6.2 P1_7.2 P2.1 P2_7.2 P3.1 P3_6.2 P4.1 P5.1 P6.1 P7.2 R6.1 R9.1 R10.1 R11.1 R15.1 R16.1 R17.1 U1.10 U1.20 U1.27 U1.74 U1.94 U1.99 U2.2 U2.13 U3.2 U4.2 UART_PWR.2
  other v1: 88.265,38.608 96.901,39.116 90.424,41.148 74.676,42.291 97.409,42.799 70.612,44.069 127.508,45.339 129.032,45.72 108.585,45.847 102.743,45.974 105.664,45.974 97.536,46.482 111.633,46.736 99.568,48.26 100.33,50.292 101.727,52.705 80.264,52.832 70.993,53.34 69.85,54.991 98.552,54.991 62.865,55.245 78.232,55.88 113.792,56.134 68.072,56.642 110.871,58.674 99.822,58.801 60.071,59.055 61.976,59.182 109.855,59.563 76.327,59.817 82.677,60.452 113.919,60.706 97.536,61.087 77.597,61.976 112.776,62.865 103.378,63.246 102.108,64.389 93.218,64.897 100.838,65.786 82.296,65.913 121.793,66.167 99.187,66.675 120.269,67.056 98.298,68.199 93.599,68.834 96.774,69.342 108.331,69.469 94.361,69.596 123.698,70.358 95.25,70.485 108.585,70.993 122.174,71.374 81.407,72.009 82.931,72.009 126.746,73.66 129.159,73.787 112.776,74.168 69.088,74.676 67.691,75.438 102.235,75.438 103.505,75.438 111.252,76.073 88.519,77.597 120.396,77.597 112.268,79.248 90.17,79.629 84.836,79.756 84.836,81.153 102.235,82.296 90.805,82.55 101.092,83.185 70.739,83.693 60.96,84.074 63.5,84.201 100.33,84.328 92.583,84.709 72.644,84.963 94.361,85.344 84.836,85.598 105.283,85.598 108.458,85.852 104.14,86.36 109.347,86.487 61.722,87.249 103.378,87.249 90.297,92.456 91.567,95.123
JTDI: J1.8 U1.77 | length 10.8
  Top Layer w0.25: U1.77 100.541,55.499 101.092,55.499 103.632,58.039 v1(104.267,58.039) ; v1(106.571,59.182) J1.8
  Bottom Layer w0.25: v1(104.267,58.039) 105.41,59.182 v1(106.571,59.182)
LED_1: SB8.2 U1.95 | length 41.6
  Top Layer w0.25: 101.224,45.854 101.224,46.614 102.87,48.26 108.077,48.26 118.491,58.674 118.491,61.92 116.213,64.198 112.966,64.198 109.728,60.96 107.808,60.96 U1.95
LED_2: SB9.2 U1.96 | length 39.6
  Top Layer w0.25: SB9.2@104.193,45.775 104.193,46.789 105.262,47.858 108.244,47.858 118.893,58.507 118.893,62.086 116.38,64.6 112.799,64.6 109.561,61.362 108.113,61.362 U1.96
LED_3: SB10.2 U1.97 | length 37
  Top Layer w0.25: U1.97 108.418,61.765 109.395,61.765 112.632,65.003 116.546,65.003 119.296,62.253 119.296,58.341 107.188,46.233 SB10.2
LED_4: SB11.2 U1.98 | length 36.2
  Top Layer w0.25: U1.98 107.211,63.625 107.229,63.625 108.687,62.167 109.228,62.167 112.466,65.405 116.713,65.405 119.698,62.42 119.698,58.174 109.982,48.458 109.982,45.974
MCU_RX: RX.1 U1.69 | length 16.4
  Top Layer w0.3: U1.69 96.386,59.289 96.386,60.84 v1(96.139,61.087)
  Bottom Layer w0.3: RX.1 86.614,56.46 87.685,57.531 88.646,57.531 90.043,58.928 90.043,59.436 90.678,60.071 95.123,60.071 v1(96.139,61.087)
MCU_TX: TX.1 U1.68 | length 17.7
  Top Layer w0.3: v1(94.615,61.341) 95.758,60.198 95.758,59.367 U1.68
  Bottom Layer w0.3: TX.1 85.217,57.277 86.791,57.277 87.498,57.983 88.459,57.983 89.591,59.115 89.591,59.623 91.308,61.341 v1(94.615,61.341)
Net1_1: 1.1 R18.1 | length 1.7
  Top Layer w0.25: 1.1 101.224,41.347 R18.1
Net2_1: 2.1 R19.1 | length 1.7
  Top Layer w0.25: 2.1 104.145,41.347 R19.1
Net3_1: 3.1 R20.1 | length 1.6
  Top Layer w0.25: 3.1 107.193,41.347 R20.1
Net4_1: 4.1 R21.1 | length 1.7
  Top Layer w0.25: R21.1@109.86,43.22 R21.1 4.1@109.94,41.514
NetBM_MODE_1: BM_MODE.1 R2.1 | length 1.6
  Top Layer w0.25: BM_MODE.1 73.947,50.865 R2.1
NetBM_PWR_1: BM_PWR.1 R25.2 | length 1.5
  Top Layer w0.25: R25.2 73.486,43.514 BM_PWR.1
NetC11_2: C11.2 U1.13 X1.2 | length 7.3
  Top Layer w0.25: U1.13 104.687,71.832 104.687,72.645 106.793,74.751 X1.2
NetC12_2: C12.2 U1.73 | length 2.1
  Top Layer w0.25: C12.2@95.084,55.157 U1.73
NetC13_2: C13.2 U1.49 | length 5.4
  Top Layer w0.25: C13.2 86.614,65.405 86.614,66.294 88.077,67.757 88.283,67.757 U1.49
NetC15_2: C15.2 U3.4 | length 1.9
  Top Layer w0.3: C15.2@82.677,84.389 U3.4
NetC16_1: C16.1 LDO_ON.2 U3.1 U3.3 | length 17.1
  Top Layer w0.8: U3.1 88.072,82.489 88.773,81.788 88.773,81.153 88.997,80.929 C16.1 ; U3.3 90.871,84.389 LDO_ON.2@94.361,80.899 ; C16.1@92.713,80.899 LDO_ON.2@94.361,80.899 ; LDO_ON.2 LDO_ON.2@94.361,80.899
NetDCDC_PWR_1: DCDC_PWR.1 R22.2 | length 1.6
  Top Layer w0.3: DCDC_PWR.1 81.345,93.98 R22.2
NetMCU_PWR_1: MCU_PWR.1 R24.2 | length 1.6
  Top Layer w0.25: MCU_PWR.1@85.287,77.422 MCU_PWR.1
  Top Layer w0.3: R24.2 MCU_PWR.1@85.287,77.422
NetP0_0_1: P0_0.1 R13.2 | length 1.8
  Top Layer w0.25: 78.232,50.038 R13.2 P0_0.1@78.232,51.878
NetP1_2_1: P1_2.1 R5.2 | length 1.6
  Top Layer w0.25: R5.2 P1_2.1
NetP1_3_1: P1_3.1 R7.2 | length 1.6
  Top Layer w0.25: R7.2 93.773,42.719 P1_3.1
NetP1_6_1: P1_6.1 R8.2 | length 1.6
  Top Layer w0.25: R8.2 97.028,50.546 P1_6.1
NetP1_7_1: P1_7.1 R4.2 | length 1.7
  Top Layer w0.25: R4.2@92.282,46.529 R4.2 93.963,46.529 P1_7.1
NetP2_7_1: P2_7.1 R12.2 | length 1.7
  Top Layer w0.25: R12.2@74.93,56.196 R12.2 P2_7.1@74.93,57.933
NetP3_6_1: P3_6.1 R14.2 | length 1.7
  Top Layer w0.25: R14.2@79.248,58.293 R14.2 79.248,59.974 P3_6.1
NetR4_1: R4.1 R6.2 SB4.1 | length 7.9
  Top Layer w0.25: SB4.1@89.893,46.529 R4.1 91.009,47.194 92.329,48.514 R6.2
NetR5_1: R5.1 R9.2 SB1.1 | length 8
  Top Layer w0.25: SB1.1@89.893,39.036 R5.1 90.882,39.955 91.821,40.894 R9.2
NetR7_1: R7.1 R10.2 SB2.1 | length 8.1
  Top Layer w0.25: SB2.1 R7.1 90.852,43.481 92.075,44.704 R10.2
NetR8_1: R8.1 R11.2 SB3.1 | length 6.9
  Top Layer w0.25: SB3.1@93.062,50.546 R8.1 94.107,51.562 94.996,52.451 R11.2
NetR12_1: R12.1 R15.2 SB5.1 | length 7.3
  Top Layer w0.25: R15.2 73.152,56.261 74.363,55.05 R12.1 SB5.1@74.93,53.934
NetR13_1: R13.1 R16.2 SB6.1 | length 7.4
  Top Layer w0.25: R16.2 76.962,50.289 R13.1 SB6.1@78.232,48.03
NetR14_1: R14.1 R17.2 SB7.1 | length 4.3
  Top Layer w0.25: SB7.1 R14.1 79.378,57.15 80.518,57.15 81.026,57.658 R17.2
NetR18_2: R18.2 SB8.1 | length 0.8
  Top Layer w0.25: R18.2 SB8.1
NetR19_2: R19.2 SB9.1 | length 0.8
  Top Layer w0.25: R19.2 SB9.1@104.145,45.212
NetR20_2: R20.2 SB10.1 | length 0.9
  Top Layer w0.25: R20.2@107.217,44.415 SB10.1@107.217,45.326
NetR21_2: R21.2 SB11.1 | length 0.8
  Top Layer w0.25: R21.2 109.987,44.587 SB11.1@109.987,45.322
NetR23_2: R23.2 UART_PWR.1 | length 1.6
  Top Layer w0.25: UART_PWR.1 UART_PWR.1@81.28,89.154
  Top Layer w0.3: UART_PWR.1@81.28,89.154 R23.2
NReset: C14.1 J1.10 MCU_RESET.2 R1.1 U1.14 | length 32.2
  Top Layer w0.25: v1(101.981,69.85) 101.981,69.833 U1.14 ; J1.10 v1(107.061,60.488) 107.13,60.558 109.895,60.558 111.248,61.911 C14.1 114.743,61.911 115.027,62.195 115.981,62.195 MCU_RESET.2 115.916,61.876 R1.1
  Bottom Layer w0.25: v1(101.981,69.85) 102.616,70.485 104.267,70.485 109.093,65.659 109.093,62.992 107.061,60.96 v1(107.061,60.488)
P0_0: SB6.2 U1.53 U2.11 | length 27.1
  Top Layer w0.25: v1(77.089,47.625) 77.865,46.849 78.867,46.849 ; SB6.2 78.867,46.849 ; U2.11 79.355,46.361 78.867,46.849 ; v1(86.36,59.944) 86.36,60.576 U1.53
  Bottom Layer w0.25: v1(77.089,47.625) 77.089,51.816 82.423,57.15 83.566,57.15 v1(86.36,59.944)
P0_2/LED: BM_MODE.2 U2.12 | length 7.2
  Top Layer w0.3: BM_MODE.2 73.947,47.465 76.073,45.339 76.073,43.815 76.721,43.167 U2.12
P1_2: SB1.2 U1.63 U2.3 | length 26.8
  Top Layer w0.25: U2.3 87.884,40.767 88.011,40.64 ; v1(89.027,40.894) 88.265,40.894 88.011,40.64 ; SB1.2 89.234,39.036 88.392,39.878 88.392,40.259 88.011,40.64 ; v1(91.059,59.182) 92.037,59.182 U1.63
  Bottom Layer w0.25: v1(89.027,40.894) 88.371,41.55 88.371,46.903 91.059,49.591 v1(91.059,59.182)
P1_3: SB2.2 U1.64 U2.4 | length 22.2
  Top Layer w0.25: U2.4 88.195,41.967 88.947,42.719 ; SB2.2 88.947,42.719 ; v1(89.281,44.196) 89.281,43.561 88.947,43.227 88.947,42.719 ; v1(91.694,51.181) 91.694,58.132 U1.64
  Bottom Layer w0.25: v1(89.281,44.196) 88.773,44.704 88.773,46.736 91.694,49.657 v1(91.694,51.181)
P1_6: SB3.2 U1.65 U2.6 | length 19.8
  Top Layer w0.25: U2.6 85.355,46.366 86.487,47.498 89.48,47.498 SB3.2 92.528,58.259 U1.65
P1_7: SB4.2 U1.66 U2.5 | length 22.6
  Top Layer w0.25: U2.5 87.744,43.167 88.519,43.942 88.519,45.574 ; 89.272,46.327 88.519,45.574 ; v1(90.262,45.143) 89.985,45.143 89.554,45.574 88.519,45.574 ; v1(93.345,52.832) 93.345,58.369 U1.66
  Bottom Layer w0.25: v1(90.262,45.143) 90.736,45.143 93.345,47.752 v1(93.345,52.832)
P2_7: SB5.2 U1.54 U2.15 | length 39.6
  Top Layer w0.25: SB5.2 74.93,53.086 75.311,52.705 v1(75.311,51.943) ; v1(75.438,39.497) 76.848,39.497 76.918,39.567 U2.15 ; v1(88.519,60.96) 88.519,62.028 U1.54
  Bottom Layer w0.25: v1(75.438,39.497) 75.438,51.816 v1(75.311,51.943) 76.073,52.705 76.073,57.277 80.01,61.214 87.122,61.214 87.376,60.96 v1(88.519,60.96)
P3_6: SB7.2 U1.52 U2.9 | length 25.1
  Top Layer w0.25: U2.9 81.755,46.007 79.248,48.514 SB7.2 80.562,55.485 U1.52
RST_BM71: BM_RESET.4 C19.2 R3.2 U2.10 | length 51.4
  Top Layer w0.25: v1(74.803,61.468) 74.803,63.246 78.486,63.246 79.286,64.046 BM_RESET.4 79.3,65.278 80.518,65.278 81.28,64.516 C19.2 ; v1(80.137,46.355) 80.555,45.937 U2.10
  Bottom Layer w0.25: v1(74.803,61.468) 71.247,57.912 71.247,53.973 71.62,53.6 71.62,39.505 72.771,38.354 75.438,38.354 76.835,39.751 76.835,45.212 77.978,46.355 v1(80.137,46.355)
SCLK: C10.2 U1.12 X1.1 | length 7.4
  Top Layer w0.25: U1.12 105.013,71.451 105.556,71.451 107.511,73.406 X1.1
SWDCLK: J1.4 U1.76 | length 8.5
  Top Layer w0.25: U1.76 100.342,54.991 101.346,54.991 103.251,56.896 105.265,56.896 J1.4
SWDIO: J1.2 U1.72 | length 18.2
  Top Layer w0.25: U1.72 95.48,56.261 94.107,56.261 93.853,56.007 93.853,54.483 95.377,52.959 96.52,52.959 97.282,53.721 100.711,53.721 103.124,56.134 104.231,56.134 J1.2
SWO: J1.6 U1.89 | length 5.1
  Top Layer w0.25: U1.89 105.156,59.37 105.156,58.801 J1.6
pads on no net: BM_RESET.1 BM_RESET.3 H9.1 H10.1 H11.1 H12.1 J1.7 MCU_RESET.1 MCU_RESET.3 P2. P3. P4. P5. P7. P7.11 U1.3 U1.4 U1.5 U1.7 U1.8 U1.9 U1.15 U1.16 U1.17 U1.18 U1.23 U1.26 U1.29 U1.32 U1.35 U1.36 U1.37 U1.38 U1.39 U1.40 U1.41 U1.42 U1.43 U1.44 U1.45 U1.51 U1.55 U1.56 U1.57 U1.58 U1.59 U1.60 U1.61 U1.62 U1.67 U1.70 U1.71 U1.78 U1.79 U1.80 U1.81 U1.82 U1.83 U1.84 U1.85 U1.86 U1.87 U1.88 U1.90 U1.91 U1.92 U1.93 U2.1

## Polygon pours and split planes (outlines as drawn)
GND on Bottom Layer "Bottom Layer - GND" (solid, remove dead copper, pour order 8): 50.038,98.425 50.165,98.298 140.716,98.298 140.716,38.354 140.843,38.227 50.292,38.227
GND on Top Layer "Top Layer - GND" (solid, remove dead copper, pour order 0): 49.022,99.441 142.113,99.441 142.113,37.592 141.986,37.465 141.478,37.973 47.752,37.973

## Other copper
Top Layer:
  pour cut-out: 62.992,34.163 62.992,42.926 72.009,42.926 72.009,34.163
  pour cut-out: 62.992,88.519 62.992,97.409 72.009,97.409 72.009,88.519
  pour cut-out: 118.364,88.519 118.364,97.409 127.254,97.409 127.254,88.519
  pour cut-out: 115.57,34.29 115.57,42.926 124.714,42.926 124.714,34.29
Bottom Layer:
  pour cut-out: 62.738,34.163 62.738,43.053 71.628,43.053 71.628,34.163
  pour cut-out: 62.992,88.519 62.992,97.409 72.136,97.409 72.136,88.519
  pour cut-out: 118.364,88.519 118.364,97.536 127.254,97.536 127.254,88.519
  pour cut-out: 115.57,34.29 115.57,43.053 124.841,43.053 124.841,34.29
  pour cut-out: 86,90.043 85,88.265

## Silkscreen, mask and mechanical layers (free items; w line width, h text height)
Top Overlay:
  lines w0.254: 80.645,52.07 81.153,51.562 ; 81.153,52.959 81.153,51.562 ; 81.153,51.562 81.661,52.07 81.153,51.562
  text "Back Left" at 131.318,93.599 h1
  text "Back Right" at 51.943,93.472 h1
  text "5V" at 125.984,86.106 h1
  text "GND" at 63.754,84.963 h1
  text "9V" at 113.157,83.947 h1
  text "GND" at 107.569,83.82 h1
  text "Buzz" at 123.571,81.407 h1
  text "Sen" at 63.627,80.137 h1
  text "Sen" at 124.841,76.327 h1
  text "Buzz" at 63.373,75.311 h1
  text "5V" at 87.249,75.311 h1 r315
  text "TX" at 85.344,73.66 h1 r315
  text "RX" at 83.566,71.628 h1 r315
  text "GND" at 124.587,71.374 h1
  text "5V" at 63.246,70.358 h1
  text "GND" at 80.899,70.358 h1 r315
  text "5V" at 125.476,58.166 h1
  text "GND" at 63.5,56.769 h1
  text "GND" at 81.534,53.594 h1 r90
  text "Buzz" at 122.301,53.34 h1
  text "Sen" at 63.881,52.07 h1
  text "Sen" at 124.46,48.514 h1
  text "Buzz" at 63.627,47.244 h1
  text "GND" at 124.46,43.053 h1
  text "5V" at 63.373,42.672 h1
  text "Front Left" at 130.429,35.433 h1
  text "Front Right" at 51.435,34.671 h1
Bottom Overlay:
  region: 918 vertices and 47 holes, not listed, extent 94.234,44.272 139.548,70.485
  text "Albatross Electronics" at 137.033,79.502 h2
  text "Central Communication / V1.0 / By: Robert Dunn" at 71.882,46.99 h1
Mechanical 1:
  the board outline again, w0.1